# Altium PCB Demo_XM1.PcbDoc
Units mil, origin at the board's own origin, x right, y up, seen from the top; angles counter-clockwise.
Board outline 1760 x 3630.09 mil, 2 copper layers (Top Layer, Bottom Layer); 111 components, 75 nets, 392 pads, 15 vias.
Unrouted connection lines stored in the file: 261.
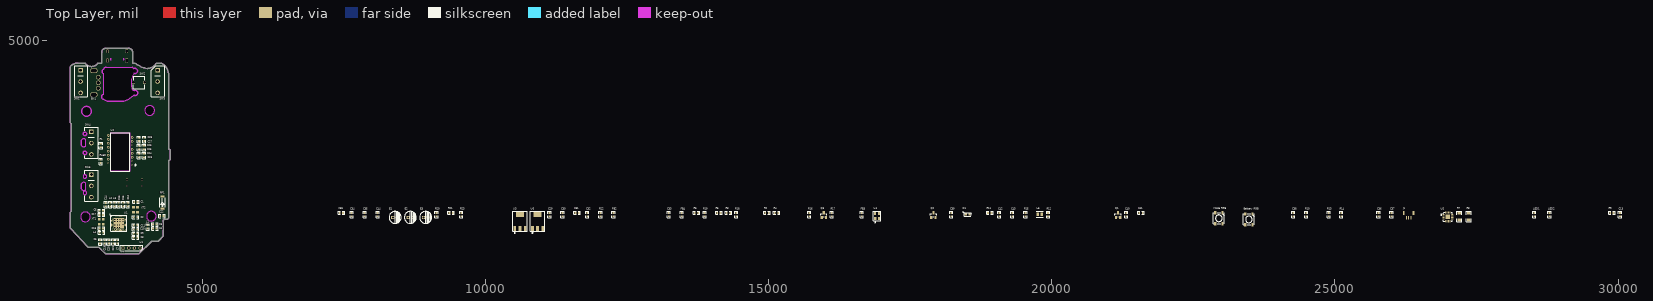
[diagram p0: Top Layer view]
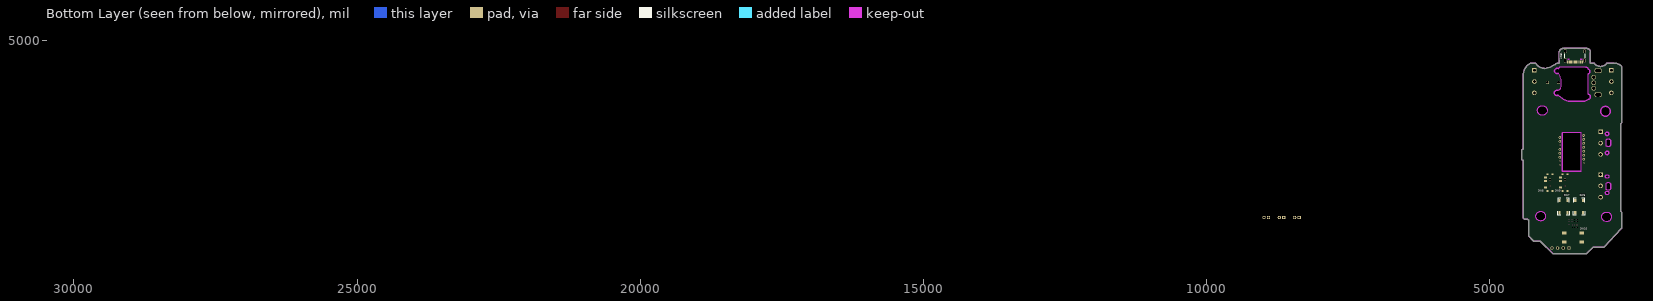
[diagram p1: Bottom Layer view, seen from below]

## Layer stack, top to bottom
Top Solder: solder mask 0.4, Solder Resist, Dk 3.5
Top Layer: signal copper 1.4
Dielectric 1: dielectric 12.6, FR-4, Dk 4.8
Bottom Layer: signal copper 1.4
Bottom Solder: solder mask 0.4, Solder Resist, Dk 3.5

## Board outline
2670,1965 2685,1980 2685,3525 2670,3540 2670,4535 cw(c2800.83,4423.06) 2810,4595 2930,4595 ccw(c3042.5,4670.42) 3155,4595 3220,4595 3220,4780 cw(c3290,4785) 3285,4855 3695,4855 cw(c3700,4785) 3770,4790 3770,4595 3810,4595 ccw(c4111.99,4987.66) 4025,4500 ccw(c4016.26,4705.97) 4190,4595 4280,4595 cw(c4167.25,4385.47) 4405,4395 4405,3075 4420,3075 4430,3065 4430,2890 4420,2880 4405,2880 4405,1860 4385,1840 4330,1840 4310,1820 4310,1540 4220,1450 4105,1450 3880,1225 3295,1225 3175,1345 2982.91,1345 2670,1680
cut-out: 3380.71,2682.72 3380.71,3362.24 3719.29,3362.24 3719.29,2682.72
cut-out: 4013.88,1892.72 ccw(c4099.91,1892.72) 4099.91,1806.69 ccw(c4099.91,1892.72) 4185.93,1892.72 ccw(c4099.91,1892.72) 4099.91,1978.74 ccw(c4099.91,1892.72)
cut-out: 2848.98,1880 ccw(c2935,1880) 2935,1793.98 ccw(c2935,1880) 3021.02,1880 ccw(c2935,1880) 2935,1966.02 ccw(c2935,1880)
cut-out: 2893.5,2302.99 ccw(c2925,2302.99) 2925,2271.5 ccw(c2925,2302.99) 2956.5,2302.99 ccw(c2925,2302.99) 2925,2334.49 ccw(c2925,2302.99)
cut-out: 2865,2372.99 ccw(c2905,2391.99) 2945,2372.99 2945,2462.99 ccw(c2905,2443.99) 2865,2462.99
cut-out: 2893.5,2592.99 ccw(c2925,2592.99) 2925,2561.5 ccw(c2925,2592.99) 2956.5,2592.99 ccw(c2925,2592.99) 2925,2624.49 ccw(c2925,2592.99)
cut-out: 2925,2978.62 cw(c2925,3010.12) 2893.5,3010.12 cw(c2925,3010.12) 2925,3041.61 cw(c2925,3010.12) 2956.5,3010.12 cw(c2925,3010.12)
cut-out: 2865,3142.99 ccw(c2905,3161.99) 2945,3142.99 2945,3232.99 ccw(c2905,3213.99) 2865,3232.99
cut-out: 2925,3315.75 cw(c2925,3347.24) 2893.5,3347.24 cw(c2925,3347.24) 2925,3378.74 cw(c2925,3347.24) 2956.5,3347.24 cw(c2925,3347.24)
cut-out: 3983.98,3760 ccw(c4070,3760) 4070,3673.98 ccw(c4070,3760) 4156.02,3760 ccw(c4070,3760) 4070,3846.02 ccw(c4070,3760)
cut-out: 2955,3658.98 cw(c2955,3745) 2868.98,3745 cw(c2955,3745) 2955,3831.02 cw(c2955,3745) 3041.02,3745 cw(c2955,3745)
cut-out: 3255,3955 cw(c3266.07,4000) 3255,4045 3255,4405 cw(c3277.5,4447.5) 3255,4490 cw(c3312.5,4462.5) 3300,4525 3760,4525 cw(c3667.5,4422.5) 3785,4495 cw(c3809.44,4456.37) 3790,4415 ccw(c4085.55,4238) 3750,4160 ccw(c3817.07,4175.11) 3795,4110 cw(c3814.44,4068.63) 3790,4030 cw(c3457.92,4364.1) 3615,3920 3325,3920 cw(c3442.5,4242.5)

## Design rules (kind name [scope] priority, off if disabled: settings)
Clearance [All] p1: gap=10 ignorepadtopadclearanceinfootprint=FALSE
PolygonConnect [All] p1: connectstyle=Relief reliefconductorwidth=10 reliefentries=4 polygonreliefangle="90 Angle" airgapwidth=10
RoutingVias [All] p1: holewidth=28 width=50 viastyle="Through Hole" minholewidth=28 minwidth=50 maxholewidth=28 maxwidth=50
SolderMaskExpansion [All] p1: expansion=4 istentingtop=FALSE
Width [All] p1: maxlimit=10 minlimit=10 preferedwidth=10
30 further rules are at their usual default settings.

## Components (designator, comment, footprint, x,y, rotation, side; value= is the part's Value field where it differs from the comment)
"Battery RGB" "WS2812B" WS2812-5050 23480,1835 r90 top
C1 "12pF" 0603C 3825,2145 r180 top
C2 "12pF" 0603C 3820,1875 r0 top
C3 "1pF" 0603C 4160,1750 r180 top
C4 "1pF" 0603C 4160,1675 r180 top
C5 "100nF" 0603C 3215,1990 r180 top
C6 "4.7uF" 0603C 3195,1440 r90 top
C7 "100nF" 0603C 3500,1439.92 r90 top
C8 "100nF" 0603C 3820.08,1510 r180 top
C9 "820pF" 0603C 3820,1585 r180 top
C10 "N.C." 0603C 3820,1660 r0 top
C11 "100pF" 0603C 3820,1735 r0 top
C12 "100nF" 0603C 3685,2100 r90 top
C13 "N.C." 0603C 30035,1920 r90 top
C14 "1uF" 0603C 3295,2094.92 r270 top
C15 "1uF" 0603C 3605,2100 r90 top
C16 "47nF" 0603C 3525,2100.08 r90 top
C17 "12pF" 0603C 3214.92,1915 r0 top
C18 "12pF" 0603C 3215,1675 r180 top
C19 "4.7uF" 0603C 3275,1440 r90 top
C20 "4.7uF" 0603C 3350,1440 r90 top
C21 "4.7uF" 0603C 3425,1440 r90 top
C22 "N.C." 0603C 4285,1895 r180 top
C23 "100nF" 0603C 3880,2965 r90 top
C24 "33uF" 0603C 3970,2965 r270 top
C25 "4.7uF" 0603C 3880,3105 r270 top
C26 "100nF" 0603C 3970,3105.08 r90 top
C27 "10uF" 0603C 3880,3250 r270 top
C28 "100nF" 0603C 3975,3250 r270 top
C29 "10uF" 0603C 11130,1920 r90 top
C30 "100nF" 0603C 11360,1920 r90 top
C31 "10nF" 0603C 11620,1950 r0 top
C32 "100nF" 0603C 11800,1920 r90 top
C33 "100nF" 0603C 13235,1920 r90 top
C34 "0.1uF" 0603C 7635,1920 r90 top
C35 "0.1uF" 0603C 7865,1920 r90 top
C36 "10uF" 0603C 25770,1920 r90 top
C37 "0.1uF" 0603C 26000,1920 r90 top
C38 "0.1uF" 0603C 24265,1920 r90 top
C39 "0.1nF" 0603C 18225,1920 r90 top
C40 "10uF" 0603C 21315,1920 r90 top
C41 "0.1uF" 0603C 21575,1950 r0 top
C42 "10uF" 0603C 19075,1920 r90 top
C43 "0.1uF" 0603C 19305,1920 r90 top
C44 "0.1uF" 0603C 8095,1920 r90 top
D1 "SS34" 0603D 18515,1925 r0 top
E1 "10uF/10V" DIP-EC2.0X5X11 8365,1870 r0 top
E2 "10uF/10V" DIP-EC2.0X5X11 8635,1870 r0 top
E3 "10uF/10V" DIP-EC2.0X5X11 8905,1870 r0 top
EN1 "Encoder" "ENCODER FOP MOUSE" 3163.94,4247.6 r90 top locked
FB1 "0 ohm" 0603C 7455,1950 r0 top
FB2 "120 ohm/0.55A" 0603C 12260,1920 r90 top
FB3 "120 ohm/0.55A" 0603C 16645,1920 r90 top
FB4 "120 ohm/0.55A" 0603C 13465,1920 r90 top
H1 "SWD Header" CON20VP2R54-1X4TM 3750,1330 r0 top
J1 "Battery Socket" "BAT SH1.0" 26300,1940 r0 top
L1 "4.7nH" 0603C 4035,1705 r270 top
L2 "10uH" 0603C 3375,2100 r270 top
L3 "15nH" 0603C 3450,2100 r90 top
L4 "10uH" 0603C 3220,1600 r0 top
L5 "10mH" "L 1.2*1.7" 19790,1925 r0 top
LED1 "Red" 0603c 28520,1920 r90 top
LED2 "Green" 0603c 28790,1920 r90 top
"Mode RGB" "WS2812B" WS2812-5050 22950,1855 r90 top
Q1 "AO3401" SOT23-3 21170,1910 r0 top
Q2 "AO3401" SOT23-3 17910,1910 r0 top
Q3 "AO3401" SOT23-3 15975,1910 r0 top
R1 "10 kohm" 0603C 3210,3140 r90 top
R2 "5.1 kohm" 0603C 14970,1950 r0 top
R3 "5.1 kohm" 0603C 14290,1950 r0 top
R4 "0 ohm" 0603C 15140,1950 r0 top
R5 "0 ohm" 0603C 14120,1950 r0 top
R6 "10 kohm" 0603C 13725,1950 r0 top
R7 "0.4 ohm" 1206C 27195,1885 r90 top
R8 "0.4 ohm" 1206C 27365,1885 r90 top
R9 "1 kohm" 0603C 29890,1950 r0 top
R10 "50 kohm" 0603C 24495,1920 r90 top
R11 "3 ohm" 0603C 18905,1950 r0 top
R12 "0.1 ohm" 0603C 19935,1920 r90 top
R13 "12 kohm" 0603C 24890,1920 r90 top
R14 "2.5 kohm" 0603C 25110,1920 r90 top
R15 "100 kohm" 0603C 19535,1920 r90 top
R16 "1 kohm" 0603C 15720,1920 r90 top
R17 "100 kohm" 0603C 16115,1920 r90 top
R18 "100 kohm" 0603C 14430,1920 r90 top
R19 "100 kohm" 0603C 13870,1920 r90 top
R20 "0 ohm" 0603C 9135,1920 r90 top
R21 "0 ohm" 0603C 9395,1950 r0 top
R22 "1 kohm" 0603C 12030,1920 r90 top
R23 "520 ohm" 0603C 9575,1920 r90 top
RF1 "Antena" "CrossAir CA-C03" 4295,2120 r180 top
RLED "13 ohm" 0603C 3205,2860 r270 top
SW1 "Left Button" "MOUSE SWITCH" 2850.2,4270 r0 top locked
SW2 "Middle Button" "X5 MIDDLE BOTTOM SET" 3882.36,4255 r0 top locked
SW3 "Right Button" "MOUSE SWITCH" 4210,4270 r0 top locked
SW4 "Side Button 1" "MOUSE SWITCH" 3040,3182.99 r0 top locked
SW5 "Side Button 2" "MOUSE SWITCH" 3040,2427.99 r0 top locked
SW6 "Reset Switch" "touch switch - dey" 3393.1,2096.58 r270 bottom
SW7 "Pairing Switch" "touch switch - dey" 3722.49,2023.42 r90 bottom
SW8 "Mode Switch" "MSK 12C02" 3935,2480 r270 bottom
SW9 "Power Switch" "MSK 12C02" 3670,2480 r270 bottom
SW10 "DPI Switch" "touch switch" 3513.48,1523.2 r180 bottom
U1 "nRF52840_QIAA_1" AQFN50P700X700X85_HS-74N 3525,1765 r0 top
U2 "PAW3399-T4QU" PAW3399-T4QU 3550,3015 r0 top locked
U3 "ASM1117-3.3V" SOT223 10610,1800 r0 top
U4 "PRTR5V0U2X" SOT143 16915,1895 r0 top
U5 "TP5100" QFN4X4-16-1 26995,1880 r0 top
U6 "ASM1117-ADJ" SOT223 10920,1800 r0 top
USB1 "USB Typec" USB-C-SMD_KH-TYPE-C-16P 3492.14,4753.12 r0 bottom locked
XT1 "32.768kHz" "CRYSTAL FOR XT1" 3214.57,1794.72 r0 top
XT2 "32MHz" "CRYSTAL FOR XT1" 3820,2005 r180 top

## Footprints (in the part's own frame and the unit in brackets; to place one, negate y for a bottom-side part, rotate by r counter-clockwise, add the part's x,y. Pads: shape width x height; smd on the part's side, far side on the other; paste and mask are expansions set on the pad)
0603C [mm]
  rect 0.76x0.8 smd: 1(-0.76,0) 2(0.76,0)
  silkscreen extent -1.46,-0.7 1.46,0.7
0603c [mm]
  rect 0.76x0.8 smd: 1(-0.76,0) 2(0.76,0)
  silkscreen extent -1.46,-0.7 1.46,0.7
0603D [mm]
  rect 1x1 smd: 1(0.85,0) 2(-0.85,0)
  silkscreen extent -2.28,-0.8 1.65,1.44
1206C [mm]
  rect 1.2x1.6 smd: 1(-1.5,0) 2(1.5,0)
  silkscreen extent -2.4,-1.1 2.4,1.1
AQFN50P700X700X85_HS-74N [mm]
  rect 4.83x4.83 smd paste+0 mask+0.051: 74(-0.003,0.029)
  round 0.275 smd paste+0 mask+0.051: A8(-1.253,3.279) A10(-0.753,3.279) A12(-0.253,3.279) A14(0.247,3.279) A16(0.747,3.279) A18(1.247,3.279) A20(1.747,3.279) A22(2.247,3.279) A23(2.747,3.279) AA24(3.247,-2.221) AB2(-2.753,-2.471) AC5(-2.003,-2.721) AC9(-1.003,-2.721) AC11(-0.503,-2.721) AC13(-0.003,-2.721) AC15(0.497,-2.721) AC17(0.997,-2.721) AC19(1.497,-2.721) AC21(1.997,-2.721) AC24(3.247,-2.721) AD2(-2.753,-3.221) AD4(-2.253,-3.221) AD6(-1.753,-3.221) AD8(-1.253,-3.221) AD10(-0.753,-3.221) AD12(-0.253,-3.221) AD14(0.247,-3.221) AD16(0.747,-3.221) AD18(1.247,-3.221) AD20(1.747,-3.221) AD22(2.247,-3.221) AD23(2.747,-3.221) B1(-3.253,2.779) B3(-2.503,2.779) B5(-2.003,2.779) B7(-1.503,2.779) B9(-1.003,2.779) B11(-0.503,2.779) B13(-0.003,2.779) B15(0.497,2.779) B17(0.997,2.779) B19(1.497,2.779) B24(3.247,2.779) C1(-3.253,2.279) D2(-2.753,2.029) D23(2.747,2.029) E24(3.247,1.779) F2(-2.753,1.529) F23(2.747,1.529) G1(-3.253,1.279) H2(-2.753,1.029) H23(2.747,1.029) J1(-3.253,0.779) J24(3.247,0.779) K2(-2.753,0.529) L1(-3.253,0.279) L24(3.247,0.279) M2(-2.753,0.029) N1(-3.253,-0.221) N24(3.247,-0.221) P2(-2.753,-0.471) P23(2.747,-0.471) R1(-3.253,-0.721) R24(3.247,-0.721) T2(-2.753,-0.971) T23(2.747,-0.971) U1(-3.253,-1.221) U24(3.247,-1.221) V23(2.747,-1.471) W1(-3.253,-1.721) W24(3.247,-1.721) Y2(-2.753,-1.971) Y23(2.747,-1.971)
  silkscreen extent -4.12,-3.57 3.6,4.07
"BAT SH1.0" [mm]
  rect 0.4x1.6 smd paste+0 mask+0.102: 1(-0.968,-1.998) 2(0.032,-1.998) 3(1.032,-1.998)
  rect 0.8x1.7 smd paste+0 mask+0.102: 4(-2.108,0.152) 5(2.172,0.152)
CON20VP2R54-1X4TM [mm]
  rect 1.5x1.5 hole 1: 1(-3.81,0)
  round 1.5 hole 1: 2(-1.27,0) 3(1.27,0) 4(3.81,0)
  silkscreen extent -5.11,-1.3 5.11,1.3
"CrossAir CA-C03" [mm]
  rect 1.9x0.9 smd paste+0 mask+0.102: 1(-0.012,2.451) 2(-0.012,-3.049)
  silkscreen extent -1.21,-2.45 1.19,1.85
"CRYSTAL FOR XT1" [mm]
  rect 1.2x1.2 smd: 1(0.9,1.15) 2(0.9,-1.15) 3(-0.9,-1.15) 4(-0.9,1.15)
DIP-EC2.0X5X11 [mm]
  rect 1.5x1.5 hole 0.8: 1(0,0)
  round 1.5 hole 0.8: 2(2,0)
  silkscreen extent -1.7,-2.7 3.7,2.7, body extent -1.52,-2.5 3.49,2.5, height 11.04
"ENCODER FOP MOUSE" [mm]
  round 2 hole 1.5: 1(-2.5,0) 1(-2.5,0) 1(-2.5,0) 2(0,0) 3(2.5,0)
  rrect50% 2x3 hole 2.5 slot 1.5 at 0 deg: 4(-5.4,2) 5(5.4,2)
"L 1.2*1.7" [mm]
  rect 1.2x1.7 smd: 1(-0.9,0) 2(0.9,0)
  silkscreen extent -1.55,-1.3 1.42,1.3
"MOUSE SWITCH" [mm]
  rect 2x2 hole 1.27: 1(-0.003,5.077)
  round 2 hole 1.27: 2(0,0) 3(0,-5.08)
  silkscreen extent -2.9,-6.83 2.9,7.04
"MSK 12C02" [mm]
  rect 0.8x0.9 smd: 0(-3.903,-1.049) 0(-3.903,1.151) 0(3.697,-1.049) 0(3.697,1.151)
  rect 0.9x1.25 smd: 1(-0.853,-2.049) 2(-2.353,-2.049) 3(2.147,-2.049)
  round 0.9 hole 0.9 unplated: ""(-1.603,0.051) ""(1.397,0.051)
PAW3399-T4QU [mm]
  round 0.7 hole 0.7: 1(5.35,-5.66) 2(5.35,-3.88) 6(5.35,3.24) 16(-5.35,-4.77)
  oval 1x1.2 hole 0.7: 3(5.35,-2.1) 4(5.35,-0.32) 5(5.35,1.46) 7(5.35,5.02) 8(5.35,6.8) 9(-5.35,7.69) 10(-5.35,5.91) 11(-5.35,4.13) 12(-5.35,2.35) 13(-5.35,0.57) 14(-5.35,-1.21) 15(-5.35,-2.99)
  silkscreen extent -4.3,-8.44 7.13,8.82
QFN4X4-16-1 [mm]
  oval 1x0.4 smd: 1(-1.95,0.975) 2(-1.95,0.325) 3(-1.95,-0.325) 4(-1.95,-0.975) 9(1.95,-0.975) 10(1.95,-0.325) 11(1.95,0.325) 12(1.95,0.975)
  oval 0.4x1 smd: 5(-0.975,-1.95) 6(-0.325,-1.95) 7(0.325,-1.95) 8(0.975,-1.95) 13(0.975,1.95) 14(0.325,1.95) 15(-0.325,1.95) 16(-0.975,1.95)
  rect 2x2 smd: 17(0,0)
  silkscreen extent -3.25,-2 2,2
SOT23-3 [mm]
  rect 1x1.4 smd: 1(-0.95,-1.1) 2(0.95,-1.1) 3(0,1.1)
  silkscreen extent -1.4,-0.7 1.4,0.7
SOT143 [mm]
  rect 1.2x1.4 smd: 1(-0.85,-1.1)
  rect 1x1.4 smd: 2(0.95,-1.1) 3(0.95,1.1) 4(-0.95,1.1)
  silkscreen extent -1.75,-2.95 1.75,2.1
SOT223 [mm]
  rect 1.2x2.2 smd: 1(-2.3,-3.1) 2(0,-3.1) 3(2.3,-3.1)
  rect 3.6x2.2 smd: 4(0,3.1)
  silkscreen extent -3.2,-5.35 3.2,4.5
"touch switch" [mm]
  rect 2x1.5 smd mask+0.102: 1(-4.356,-2.176) 2(-4.356,1.824) 3(3.644,1.824) 4(3.644,-2.176)
"touch switch - dey" [mm]
  rect 1.5x1 smd: 1(-1.821,-2.433) 2(-1.821,1.067) 3(3.679,1.067) 4(3.679,-2.433)
  silkscreen extent -2.84,-3.23 4.7,1.87
USB-C-SMD_KH-TYPE-C-16P [mm]
  oval 1.2x2 hole 0.7 slot 1.7 at 90 deg paste-2539.97 mask+0.051: 1(-4.255,2.806) 2(4.385,2.806)
  oval 1.2x1.8 hole 0.7 slot 1.4 at 90 deg paste-2539.97 mask+0.051: 3(-4.255,-1.374) 4(4.385,-1.374)
  rect 0.3x1.3 smd paste-100 mask+0.05: A1(-3.285,3.457) A4(-2.485,3.457) A5(-1.185,3.457) A6(-0.185,3.457) A7(0.315,3.457) A8(1.314,3.457) A9(2.615,3.456) A12(3.415,3.457) B1(3.115,3.457) B4(2.315,3.456) B5(1.815,3.457) B6(0.815,3.457) B7(-0.685,3.457) B8(-1.685,3.457) B9(-2.185,3.457) B12(-2.985,3.457)
  Keep-Out Layer board cut-out: -3.055,2.276 -3.033,2.377 -2.969,2.457 -2.877,2.502 -2.774,2.502 -2.682,2.457 -2.618,2.377 -2.595,2.276 -2.595,2.276 -2.618,2.176 -2.682,2.096 -2.774,2.051 -2.877,2.051 -2.969,2.096 -3.033,2.176 -3.055,2.276
  Keep-Out Layer board cut-out: 2.725,2.276 2.747,2.376 2.811,2.456 2.903,2.501 3.006,2.501 3.098,2.456 3.162,2.376 3.185,2.276 3.185,2.276 3.162,2.177 3.098,2.097 3.006,2.052 2.903,2.052 2.811,2.097 2.747,2.177 2.725,2.276
  silkscreen extent -4.51,-0.28 4.64,1.61
WS2812-5050 [mm]
  rect 1.5x1 smd paste+0 mask+0.051: 1(-2.451,1.65) 2(-2.451,-1.65) 3(2.449,-1.65) 4(2.449,1.65)
  silkscreen extent -2.5,-2.5 2.5,2.5
"X5 MIDDLE BOTTOM SET" [mm]
  round 1.4 hole 1.2: 1(-2.5,0) 2(2.5,0)
  silkscreen extent -2.51,-2.79 2.51,2.79

## Part data
"Battery RGB" "Mode RGB": "RGB灯"
C1 C2 C3 C4 C5 C6 C7 C8 C9 C10 C11 C12 C13 C14 C15 C16 C17 C18 C19 C20 C21 C22 C23 C24 C25 C26 C27 C28 C29 C30 C31 C32 C33 C34 C35 C36 C37 C38 C39 C40 C41 C42 C43 C44: library part Capacitor, "贴片电容"
D1: library part Diode, "开关二极管", BOM名称=肖特基二极管, 学习资源=www.ooocke.com, 属性=100V/5A, 版权归属=源创客
E1 E2 E3: library part "Polarized Electrolytic Capacitor", "直插电解电容", BOM名称=直插电解电容, 学习资源=www.ooocke.com, 版权归属=源创客
EN1: "编码器"
FB1: library part Resistor, "磁珠 Ferrite Bead", BOM名称=贴片电阻
FB2 FB3 FB4 R1 R2 R3 R4 R5 R6 R7 R8 R9 R10 R11 R12 R13 R14 R15 R16 R17 R18 R19 R20 R21 R22 R23 RLED: library part Resistor, "贴片电阻", BOM名称=贴片电阻
H1: "SWD烧录接口"
J1: "电池插座"
L1 L2 L3 L4 L5: library part Inductor, "电感"
LED1 LED2: library part LED, "LED"
Q1 Q2 Q3: "AO3401 PMOS", JLCPCB Part Class="Extended Part", Manufacturer=TWGMC, Contributor=LCSC, Manufacturer Part=AO3401, spicePre=Q, spiceSymbolName=AO3401_C727156, Supplier=LCSC, Supplier Part=C727156
RF1: "天线"
SW1 SW3 SW4 SW5: library part Switch, "微动"
SW2: "中键"
SW6 SW7 SW10: library part "Touch Switch", "轻触开关"
SW8 SW9: library part "Slide Switch", "拨动开关"
U1: "nRF52840"
U3 U6: library part ASM1117, "LDO"
U4: "ESD保护二极管"
U5: "锂电池充电模块"
USB1: "USB TYPEC 接口"
XT1 XT2: library part Crystal, "晶振"

## Via types
v1: diameter 19.68, hole 9.84, Top Layer to Bottom Layer, 15 vias

## Nets (pads, with @x,y where several pads share a name; then routed paths per layer and width w, separated by ;. In a path a pad name is that pad's centre, name@x,y a point inside that pad or via, vN(x,y) a via of type N, cw(c..) or ccw(c..) an arc to the next point about the centre after c; other vN are vias at no path point)
DEC1: C5.1 U1.C1
DEC3: C11.1 U1.D23
DEC4_6: C10.1 C15.2 C16.2 L3.1 U1.B5 U1.E24
GND: "Battery RGB.2" "Mode RGB.2" C1.2 C2.2 C3.1 C4.1 C5.2 C6.1 C7.1 C8.1 C9.1 C10.2 C11.2 C12.1 C13.1 C14.2 C15.1 C16.1 C17.1 C18.1 C19.1 C20.1 C21.1 C22.1 C23.1 C24.2 C29.1 C30.1 C31.1 C32.1 C33.1 C34.1 C35.1 C36.1 C37.1 C38.1 C39.1 C40.1 C41.1 C42.1 C43.1 C44.1 D1.1 E1.2 E2.2 E3.2 EN1.1 EN1.4 EN1.5 FB1.1 FB3.1 FB4.1 H1.1 J1.3 J1.4 J1.5 R6.1 R10.1 R13.1 R15.2 R19.2 R23.2 SW1.2 SW2.1 SW3.2 SW4.2 SW5.2 SW6.1 SW6.4 SW7.1 SW7.4 SW8.3 SW9.3 SW10.1 SW10.4 U1.74 U1.B7 U1.F23 U2.3 U3.1 U3.4 U4.1 U5.7 U6.4 XT1.2 XT1.4 XT2.2 XT2.4
  other v1: 3454,1695.26 3501.25,1695.26 3534.87,1695.26 3454,1736.13 3501.25,1736.13 3534.87,1736.13 3595.74,1746.13 3454,1796.13 3501.25,1796.13 3548.49,1796.13 3595.74,1796.13 3454,1837 3501.25,1837 3548.49,1837 3595.74,1837
GNDIO: C25.1 C26.2 C27.1 C28.1 FB1.2 U2.8
"NetBattery RGB_3": "Battery RGB.3" "Mode RGB.1"
NetC3_2: C3.2 L1.1 U1.H23
NetC4_2: C4.2 C22.2 L1.2
NetC9_2: C9.2 U1.N24
NetC13_2: C13.2 U1.A18
NetC20_2: C20.2 U1.AC5
NetC25_2: C25.2 C26.1 U2.5
NetC33_2: C33.2 FB4.2 R6.2 USB1.1 USB1.2 USB1.3 USB1.4
NetC36_2: C36.2 C37.2 Q1.3 Q2.1 R7.1 R8.1 R9.2 R15.1 U5.1 U5.4 U5.5 U5.16
NetC38_2: C38.2 R14.1 U5.10
NetC39_2: C39.2 R11.1
NetC40_2: C40.2 C41.2 L5.2 R12.2 U5.8
NetD1_2: D1.2 L5.1 R11.2 U5.2 U5.3
NetEN1_2: EN1.2 U1.AD18
NetEN1_3: EN1.3 U1.AC17
NetFB3_2: FB3.2 R2.1 R3.2 USB1.A1 USB1.A12 USB1.B1 USB1.B12
NetH1_2: H1.2 U1.AA24
NetH1_3: H1.3 U1.AC24
NetJ1_2: J1.2 R13.2 R14.2 U5.11
NetL2_1: L2.1 L3.2
NetL2_2: L2.2 U1.B3
NetL4_2: L4.2 U1.AB2
NetLED1_1: LED1.1 U5.15
NetLED1_2: LED1.2 LED2.2 R9.1
NetLED2_1: LED2.1 U5.14
"NetMode RGB_3": "Mode RGB.3" U1.AC21
NetQ1_1: Q1.1 U5.6
NetQ3_1: Q3.1 R16.2
NetQ3_3: Q3.3 R18.1
NetR1_1: R1.1 U1.W24 U2.12
NetR2_2: R2.2 USB1.B5
NetR3_1: R3.1 USB1.A5
NetR4_1: R4.1 U1.AD6
NetR4_2: R4.2 U4.3 USB1.A6 USB1.B6
NetR5_1: R5.1 U1.AD4
NetR5_2: R5.2 U4.2 USB1.A7 USB1.B7
NetR10_2: R10.2 U5.12
NetR16_1: R16.1 R17.2 U1.A14
NetR18_2: R18.2 R19.1 U1.B13
NetR22_2: R22.2 R23.1 U6.1
NetRLED_1: RLED.1 U2.15
NetSW1_1: SW1.1 U1.AD8
NetSW2_2: SW2.2 U1.AC9
NetSW3_1: SW3.1 U1.AD10
NetSW4_1: SW4.1 U1.AC11
NetSW5_1: SW5.1 U1.AD12
NetSW6_2: SW6.2 SW6.3 U1.AC13
NetSW7_2: SW7.2 SW7.3 U1.AD20
NetSW8_2: SW8.2 U1.AC19
NetSW8_4: 
NetSW9_4: 
NetSW10_2: SW10.2 SW10.3 U1.AC15
NetU1_R24: U1.R24 U2.14
NetU1_T23: U1.T23 U2.9
NetU1_U24: U1.U24 U2.13
NetU1_V23: U1.V23 U2.11
NetU1_Y23: U1.Y23 U2.10
P0.00/XL1: C17.2 U1.D2 XT1.1
P0.01/XL2: C18.2 U1.F2 XT1.3
V_BAT: C42.2 C43.2 J1.1 Q2.3 Q3.2 R12.1 R17.1 U5.9
V_Supply_5V: C34.2 E1.1 Q1.2 U3.3
VBUS_nRF: C21.2 C32.2 FB2.2 U1.AD2
VCC_1.9V: C23.2 C24.1 C44.2 E3.1 R22.1 RLED.2 U2.4 U6.2
VCC_3.3V: "Battery RGB.4" "Mode RGB.4" C27.2 C28.2 C35.2 E2.1 H1.4 Q2.2 R1.2 SW8.1 SW9.1 U2.7 U3.2
VCC_5V: C29.2 C30.2 C31.2 FB2.1 R7.2 R8.2 U4.4 USB1.A4 USB1.A9 USB1.B4 USB1.B9
VCC_Core: R20.2 SW9.2 U6.3
VDD_HV: C19.2 R21.1 U1.Y2
VDD_nRF: C6.2 C7.2 C8.2 C12.2 C14.1 L4.1 R20.1 R21.2 U1.A22 U1.AD14 U1.AD23 U1.B1 U1.W1
XC1: C1.1 U1.B24 XT2.3
XC2: C2.1 U1.A23 XT2.1
pads on no net: "Battery RGB.1" RF1.1 RF1.2 SW1.3 SW3.3 SW4.3 SW5.3 SW8. SW8.0 SW9. SW9.0 U1.A8 U1.A10 U1.A12 U1.A16 U1.A20 U1.AD16 U1.AD22 U1.B9 U1.B11 U1.B15 U1.B17 U1.B19 U1.G1 U1.H2 U1.J1 U1.J24 U1.K2 U1.L1 U1.L24 U1.M2 U1.N1 U1.P2 U1.P23 U1.R1 U1.T2 U1.U1 U2.1 U2.2 U2.6 U2.16 U5.13 U5.17 USB1.A8 USB1.B8

## Keep-outs
Keep-Out Layer:
  lines w10: 2670,1680 2670,1965 2685,1980 2685,3525 2670,3540 2670,4535 cw(c2800.83,4423.06) 2810,4595 2930,4595 ccw(c3042.5,4670.42) 3155,4595 3220,4595 3220,4780 cw(c3290,4785) 3285,4855 3695,4855 cw(c3700,4785) 3770,4790 3770,4595 3810,4595 ccw(c4111.99,4987.66) 4025,4500 ccw(c4016.26,4705.97) 4190,4595 4280,4595 cw(c4167.25,4385.47) 4405,4395 4405,3075 4420,3075 4430,3065 4430,2890 4420,2880 4405,2880 4405,1860 4385,1840 4330,1840 4310,1820 4310,1540 4220,1450 4105,1450 3880,1225 3295,1225 3175,1345 2982.91,1345 2670,1680 ; 2848.98,1880 cw(c2935,1880) 2935,1966.02 cw(c2935,1880) 3021.02,1880 cw(c2935,1880) 2935,1793.98 cw(c2935,1880) 2848.98,1880 ; 2865,2372.99 ccw(c2905,2391.99) 2945,2372.99 2945,2462.99 ccw(c2905,2443.99) 2865,2462.99 2865,2372.99 ; 2865,3142.99 ccw(c2905,3161.99) 2945,3142.99 2945,3232.99 ccw(c2905,3213.99) 2865,3232.99 2865,3142.99 ; 2868.98,3745 cw(c2955,3745) 2955,3831.02 cw(c2955,3745) 3041.02,3745 cw(c2955,3745) 2955,3658.98 cw(c2955,3745) 2868.98,3745 ; 2893.5,2302.99 cw(c2925,2302.99) 2925,2334.49 cw(c2925,2302.99) 2956.5,2302.99 cw(c2925,2302.99) 2925,2271.5 cw(c2925,2302.99) 2893.5,2302.99 ; 2893.5,2592.99 cw(c2925,2592.99) 2925,2624.49 cw(c2925,2592.99) 2956.5,2592.99 cw(c2925,2592.99) 2925,2561.5 cw(c2925,2592.99) 2893.5,2592.99 ; 2893.5,3010.12 cw(c2925,3010.12) 2925,3041.61 cw(c2925,3010.12) 2956.5,3010.12 cw(c2925,3010.12) 2925,2978.62 cw(c2925,3010.12) 2893.5,3010.12 ; 2893.5,3347.24 cw(c2925,3347.24) 2925,3378.74 cw(c2925,3347.24) 2956.5,3347.24 cw(c2925,3347.24) 2925,3315.75 cw(c2925,3347.24) 2893.5,3347.24 ; 3255,3955 ccw(c3442.5,4242.5) 3325,3920 3615,3920 ccw(c3457.92,4364.1) 3790,4030 ccw(c3814.44,4068.63) 3795,4110 cw(c3817.07,4175.11) 3750,4160 cw(c4085.55,4238) 3790,4415 ccw(c3809.44,4456.37) 3785,4495 ccw(c3667.5,4422.5) 3760,4525 3300,4525 ccw(c3312.5,4462.5) 3255,4490 ccw(c3277.5,4447.5) 3255,4405 3255,4045 ccw(c3266.07,4000) 3255,3955 ; 3371.85,4663.5 cw(c3380.9,4663.5) 3389.96,4663.5 cw(c3380.9,4663.5) 3371.85,4663.5 ; 3380.71,2682.72 3719.29,2682.72 3719.29,3362.24 3380.71,3362.24 3380.71,2682.72 ; 3599.41,4663.5 cw(c3608.46,4663.54) 3617.52,4663.5 cw(c3608.46,4663.46) 3599.41,4663.5 ; 3983.98,3760 cw(c4070,3760) 4070,3846.02 cw(c4070,3760) 4156.02,3760 cw(c4070,3760) 4070,3673.98 cw(c4070,3760) 3983.98,3760 ; 4013.88,1892.72 cw(c4099.91,1892.72) 4099.91,1978.74 cw(c4099.91,1892.72) 4185.93,1892.72 cw(c4099.91,1892.72) 4099.91,1806.69 cw(c4099.91,1892.72) 4013.88,1892.72

## Silkscreen, mask and mechanical layers (free items; w line width, h text height)
Top Overlay:
  lines w10: 2925.65,2645.65 2925.65,2704.99 ; 2925.65,3400.65 2925.65,3459.99 ; 2926,2158.99 2926,2249 ; 2926,2913.99 2926,2959
Mechanical 1:
  lines w10: 2670,1680 2670,1965 2685,1980 2685,3525 2670,3540 2670,4535 cw(c2800.83,4423.06) 2810,4595 2930,4595 ccw(c3042.5,4670.42) 3155,4595 3220,4595 3220,4780 cw(c3290,4785) 3285,4855 3695,4855 cw(c3700,4785) 3770,4790 3770,4595 3810,4595 ccw(c4111.99,4987.66) 4025,4500 ccw(c4016.26,4705.97) 4190,4595 4280,4595 cw(c4167.25,4385.47) 4405,4395 4405,3075 4420,3075 4430,3065 4430,2890 4420,2880 4405,2880 4405,1860 4385,1840 4330,1840 4310,1820 4310,1540 4220,1450 4105,1450 3880,1225 3295,1225 3175,1345 2982.91,1345 2670,1680 ; 2848.98,1880 cw(c2935,1880) 2935,1966.02 cw(c2935,1880) 3021.02,1880 cw(c2935,1880) 2935,1793.98 cw(c2935,1880) 2848.98,1880 ; 2865,2372.99 ccw(c2905,2391.99) 2945,2372.99 2945,2462.99 ccw(c2905,2443.99) 2865,2462.99 2865,2372.99 ; 2865,3142.99 ccw(c2905,3161.99) 2945,3142.99 2945,3232.99 ccw(c2905,3213.99) 2865,3232.99 2865,3142.99 ; 2868.98,3745 cw(c2955,3745) 2955,3831.02 cw(c2955,3745) 3041.02,3745 cw(c2955,3745) 2955,3658.98 cw(c2955,3745) 2868.98,3745 ; 2893.5,2302.99 cw(c2925,2302.99) 2925,2334.49 cw(c2925,2302.99) 2956.5,2302.99 cw(c2925,2302.99) 2925,2271.5 cw(c2925,2302.99) 2893.5,2302.99 ; 2893.5,2592.99 cw(c2925,2592.99) 2925,2624.49 cw(c2925,2592.99) 2956.5,2592.99 cw(c2925,2592.99) 2925,2561.5 cw(c2925,2592.99) 2893.5,2592.99 ; 2893.5,3010.12 cw(c2925,3010.12) 2925,3041.61 cw(c2925,3010.12) 2956.5,3010.12 cw(c2925,3010.12) 2925,2978.62 cw(c2925,3010.12) 2893.5,3010.12 ; 2893.5,3347.24 cw(c2925,3347.24) 2925,3378.74 cw(c2925,3347.24) 2956.5,3347.24 cw(c2925,3347.24) 2925,3315.75 cw(c2925,3347.24) 2893.5,3347.24 ; 3255,3955 ccw(c3442.5,4242.5) 3325,3920 3615,3920 ccw(c3457.92,4364.1) 3790,4030 ccw(c3814.44,4068.63) 3795,4110 cw(c3817.07,4175.11) 3750,4160 cw(c4085.55,4238) 3790,4415 ccw(c3809.44,4456.37) 3785,4495 ccw(c3667.5,4422.5) 3760,4525 3300,4525 ccw(c3312.5,4462.5) 3255,4490 ccw(c3277.5,4447.5) 3255,4405 3255,4045 ccw(c3266.07,4000) 3255,3955 ; 3371.85,4663.5 cw(c3380.9,4663.5) 3389.96,4663.5 cw(c3380.9,4663.5) 3371.85,4663.5 ; 3380.71,2682.72 3719.29,2682.72 3719.29,3362.24 3380.71,3362.24 3380.71,2682.72 ; 3599.41,4663.5 cw(c3608.46,4663.54) 3617.52,4663.5 cw(c3608.46,4663.46) 3599.41,4663.5 ; 3983.98,3760 cw(c4070,3760) 4070,3846.02 cw(c4070,3760) 4156.02,3760 cw(c4070,3760) 4070,3673.98 cw(c4070,3760) 3983.98,3760 ; 4013.88,1892.72 cw(c4099.91,1892.72) 4099.91,1978.74 cw(c4099.91,1892.72) 4185.93,1892.72 cw(c4099.91,1892.72) 4099.91,1806.69 cw(c4099.91,1892.72) 4013.88,1892.72

## Text inside footprints (layer, text, board x,y; h text height)
H1: Top Overlay "1" at 3610,1250 h30 r90